# Altium PCB smartMCUpcb.PcbDoc
Units mil, origin at the board's own origin, x right, y up, seen from the top; angles counter-clockwise.
Board outline 2457.03 x 1607.03 mil, 4 copper layers (Top Layer, GND_layer, 3.3v_layer, Bottom Layer), stack 23.756 mil thick; 92 components, 44 nets, 279 pads, 102 vias.
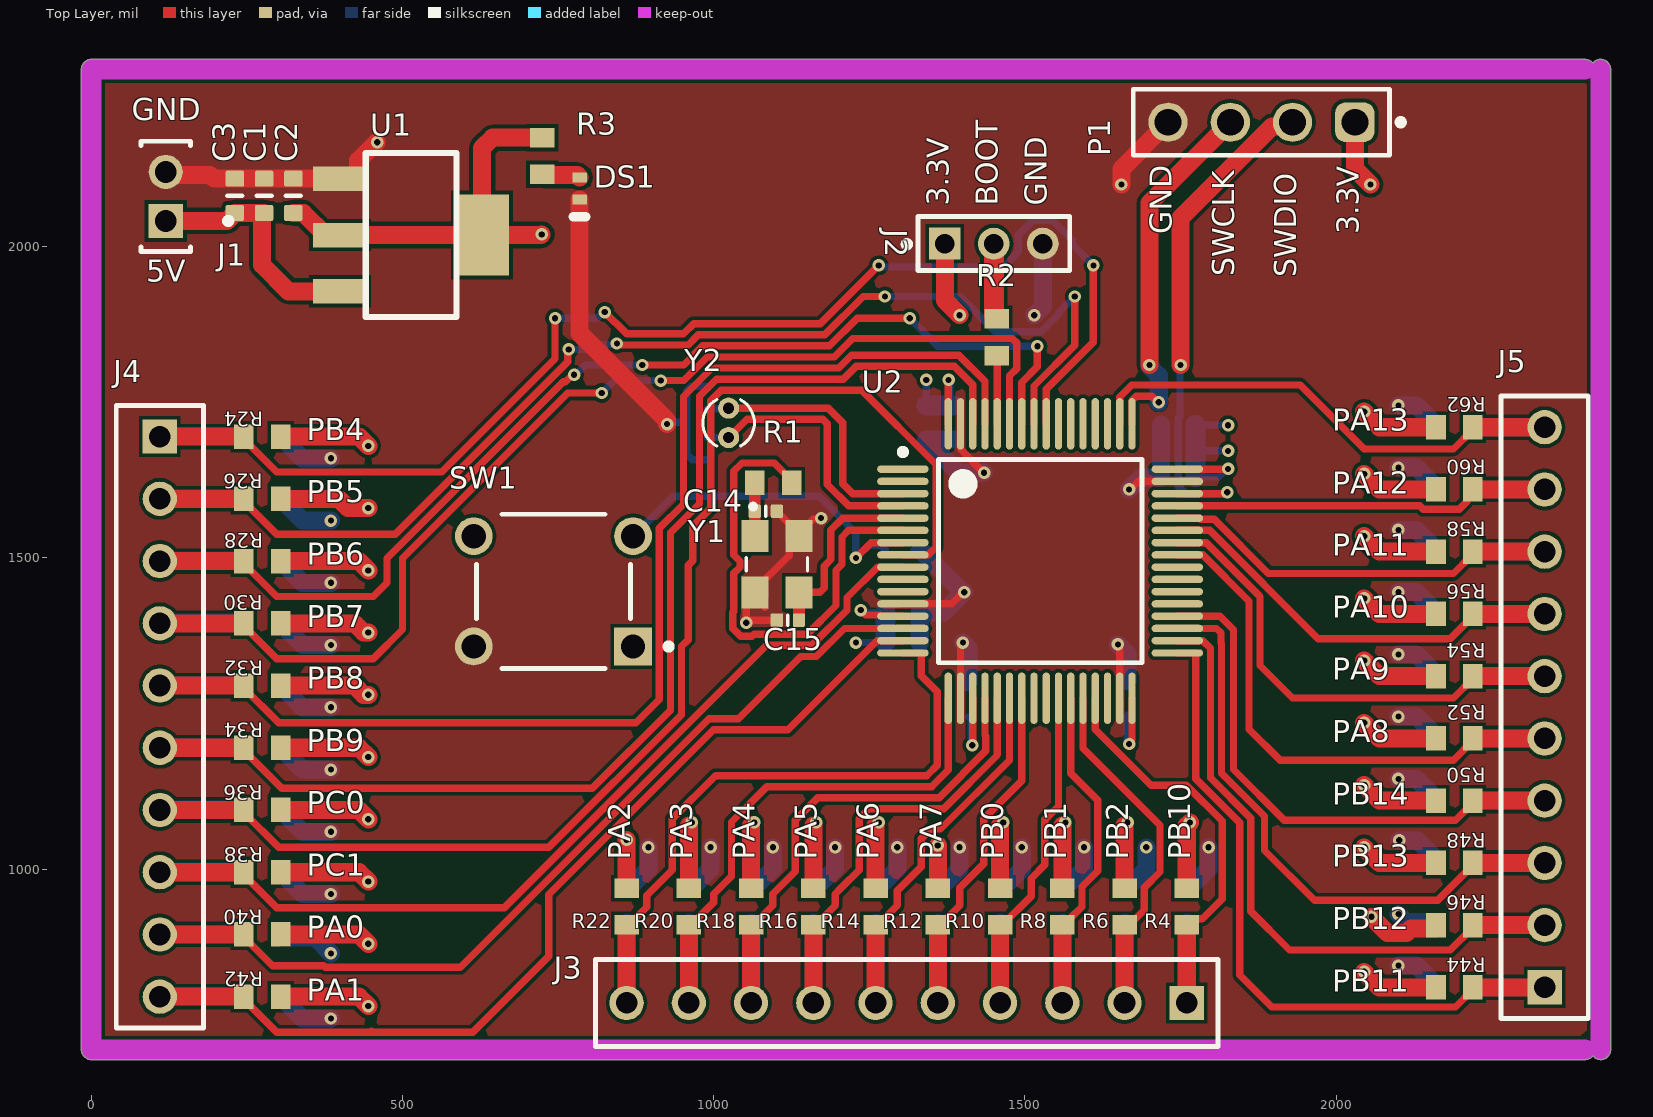
[diagram p0: Top Layer view]
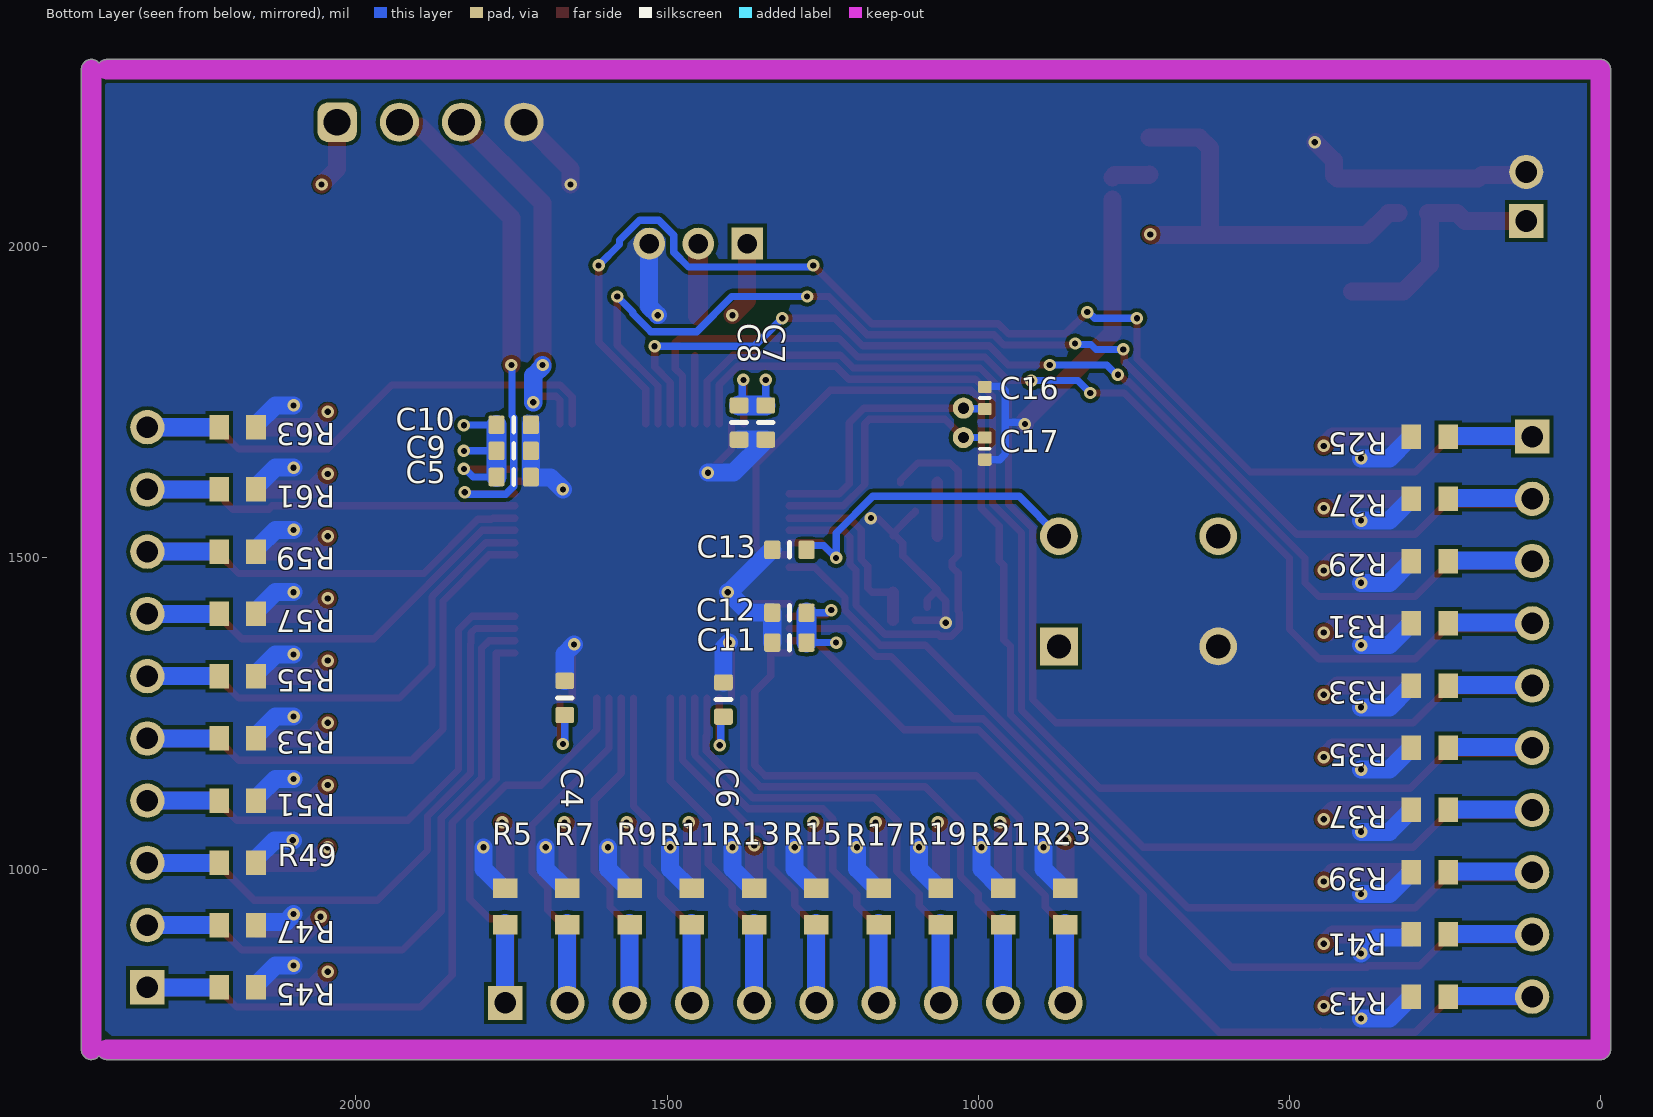
[diagram p1: Bottom Layer view, seen from below]
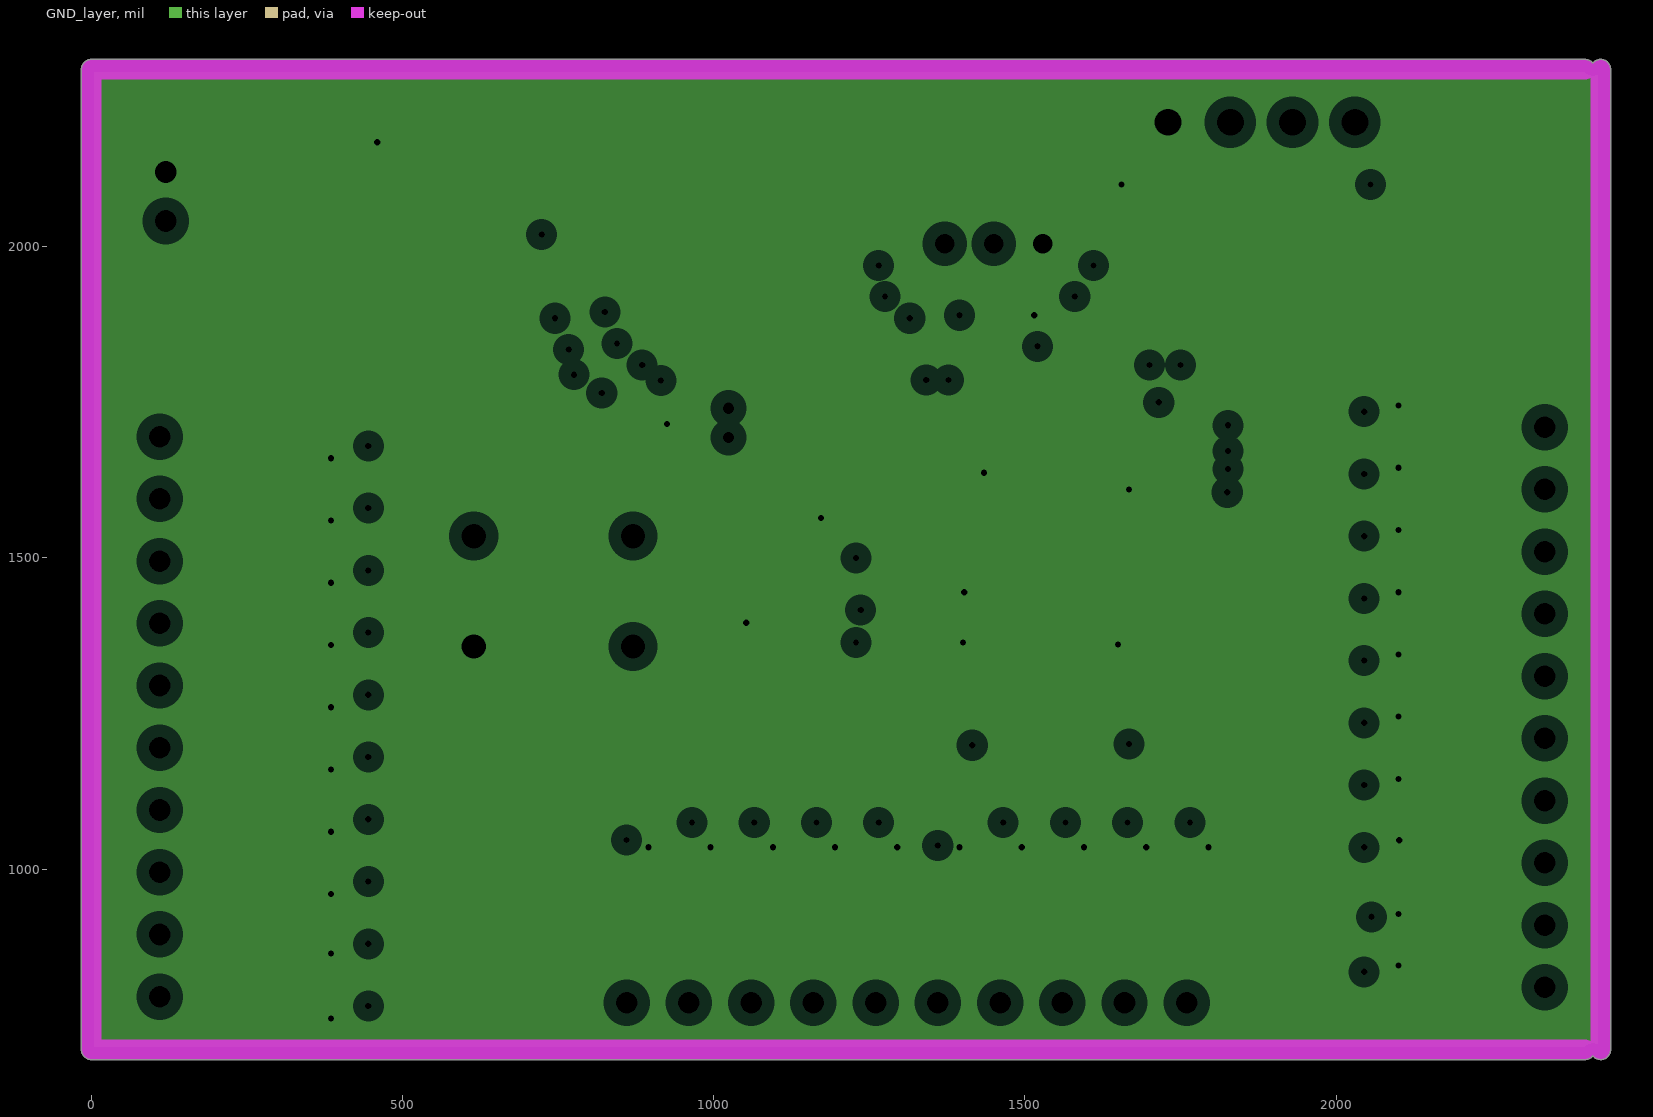
[diagram p2: GND_layer, clearances drawn from the general rule]
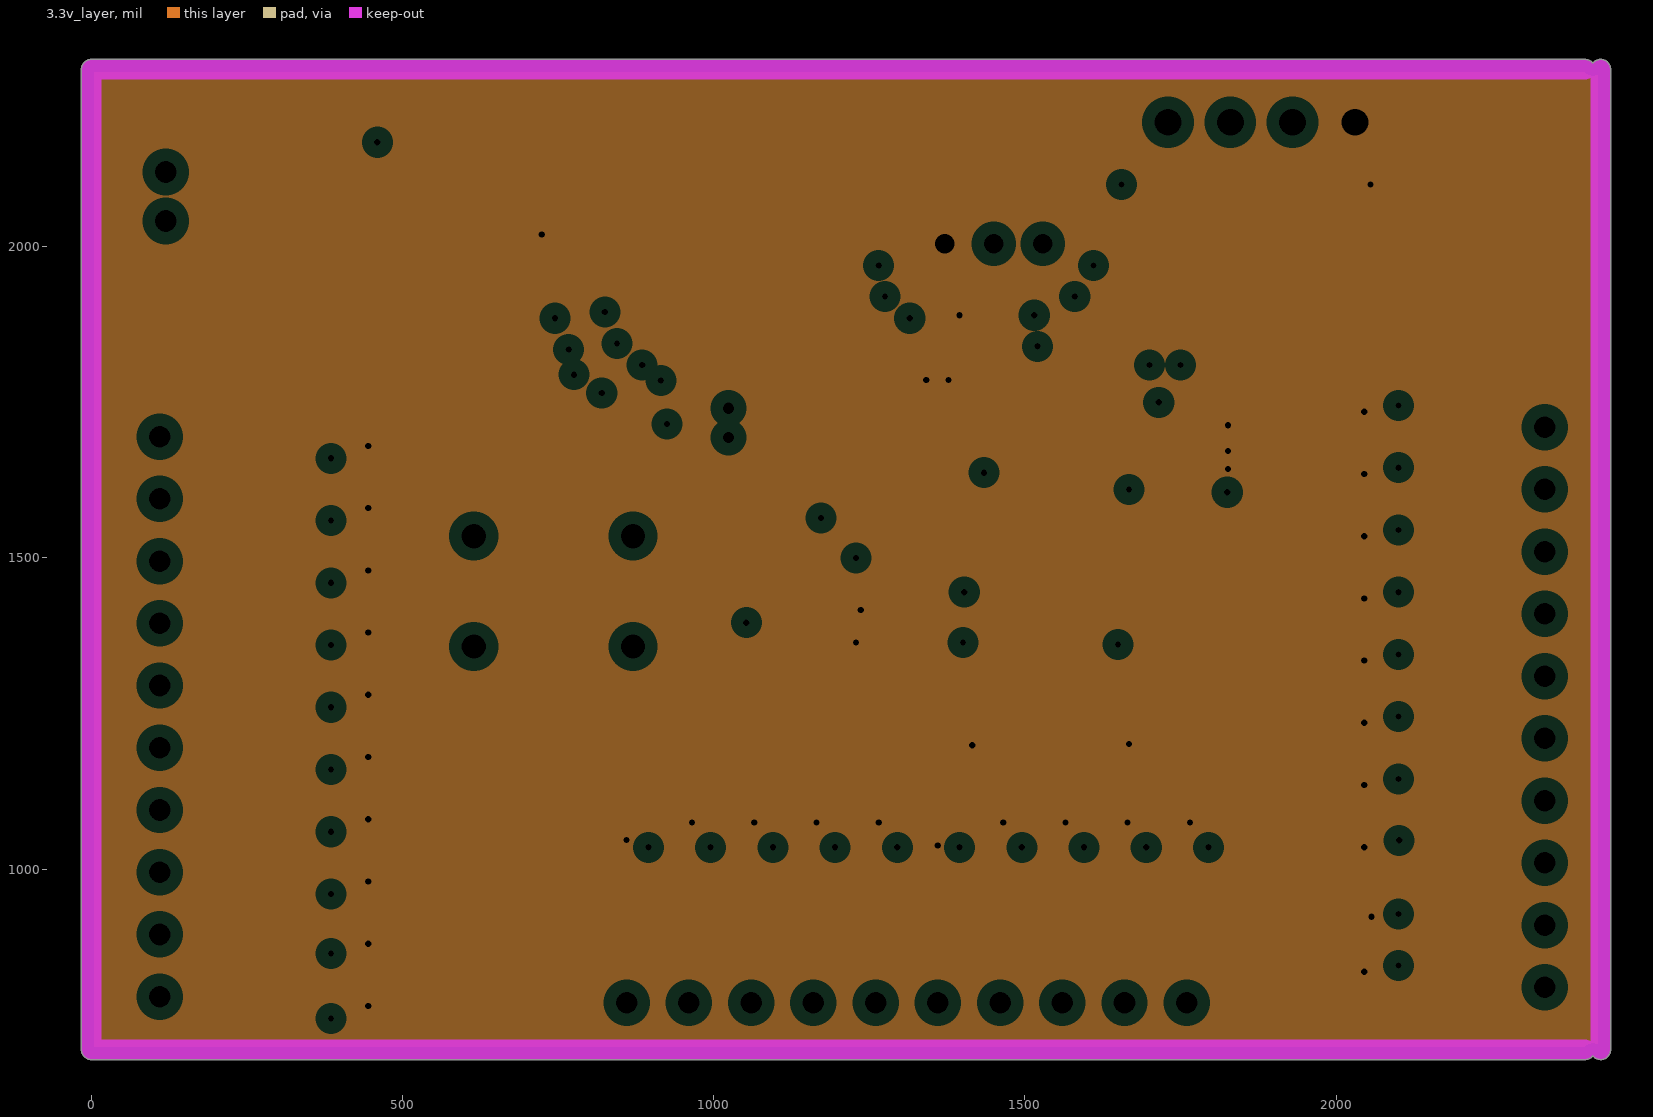
[diagram p3: 3.3v_layer, clearances drawn from the general rule]
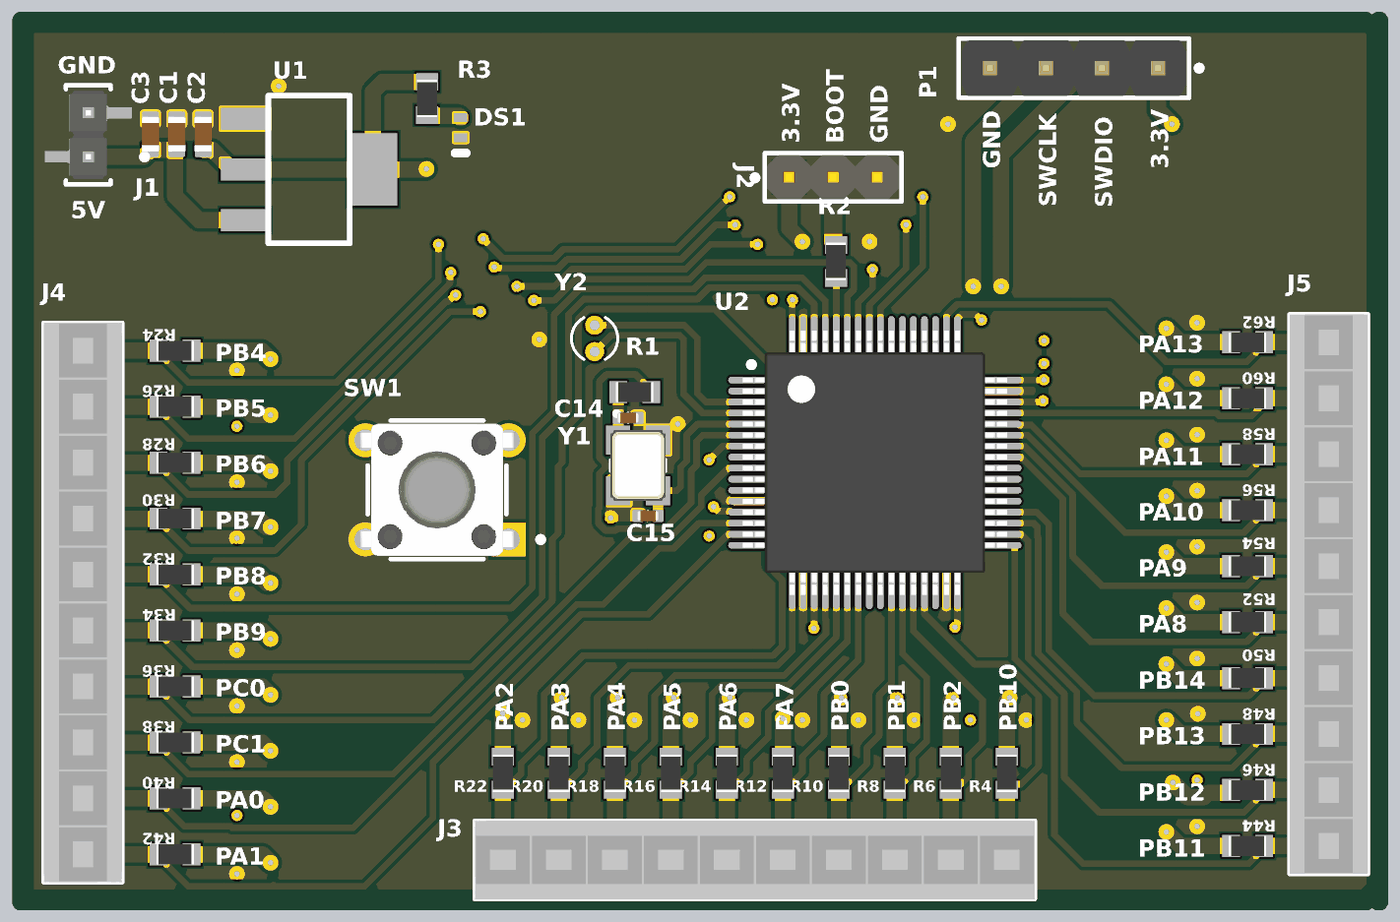
[diagram p4: 3D render of the assembled board from above, using the file's embedded part models]
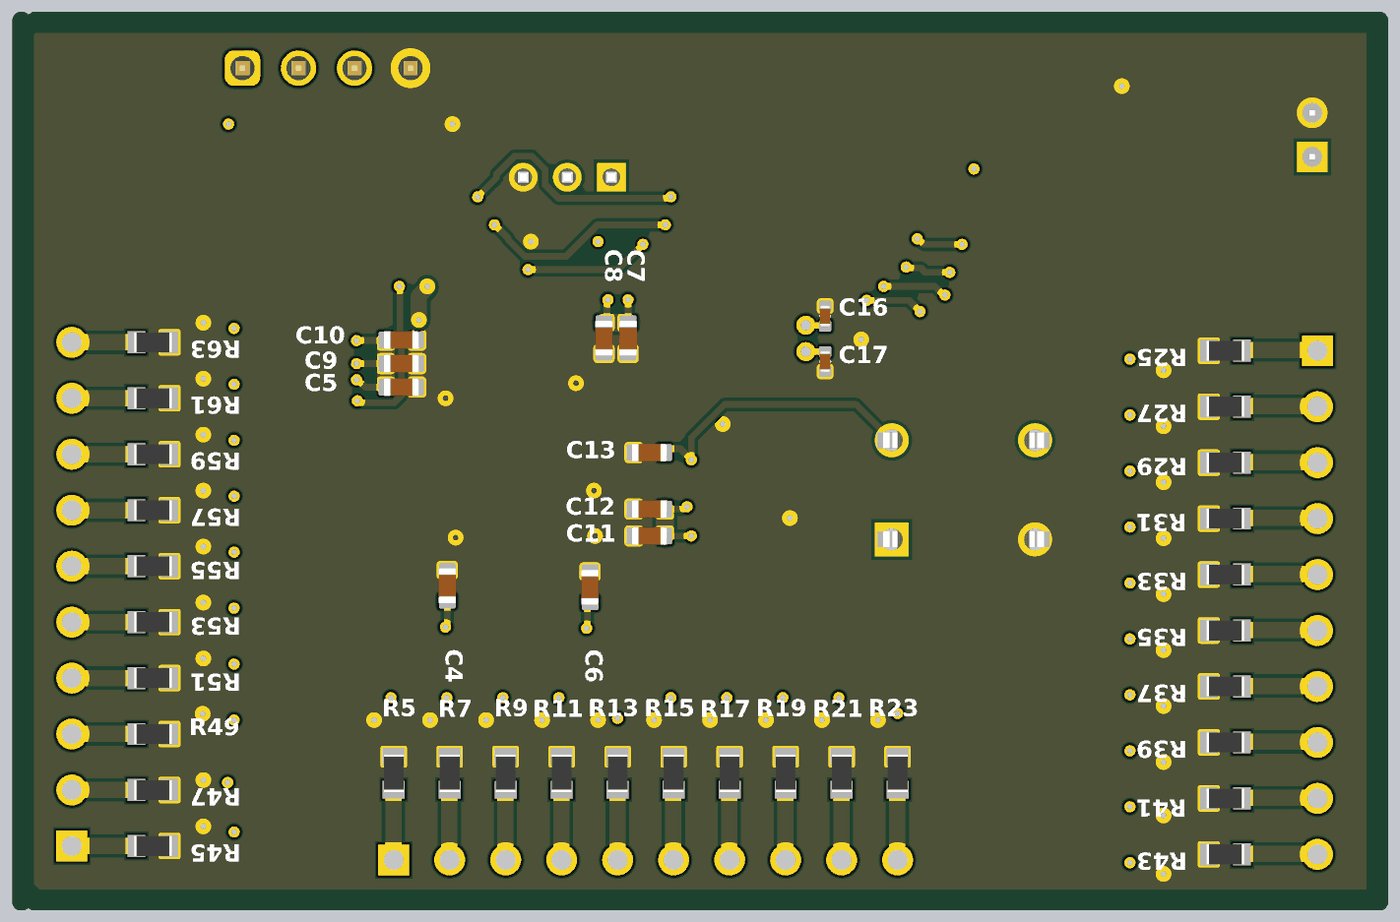
[diagram p5: 3D render of the assembled board from below, using the file's embedded part models]

## Layer stack, top to bottom
Top Solder: solder mask 0.4, Solder Resist, Dk 3.5
Top Layer: signal copper 1.4
Dielectric 2: prepreg 2.8, PP-006, Dk 4.1
GND_layer: plane copper 1.378, net GND
Dielectric 1: dielectric 12.6, FR-4, Dk 4.8
3.3v_layer: plane copper 1.378, net +3.3V
Dielectric 3: prepreg 2.8, PP-006, Dk 4.1
Bottom Layer: signal copper 1.4
Bottom Solder: solder mask 0.4, Solder Resist, Dk 3.5

## Board outline
0,693.98 cw(c0,710) -16.01,710 -16.01,2285 cw(c0,2285) 0,2301.01 2400,2301.01 cw(c2400,2285) 2412.5,2295.01 cw(c2425,2285) 2441.01,2285 2441.02,710 cw(c2425,710) 2412.5,699.99 cw(c2400,710) 2400,693.98

## Design rules (kind name [scope] priority, off if disabled: settings)
Clearance [All] p1: gap=6 ignorepadtopadclearanceinfootprint=FALSE
PlaneClearance [All] p1: clearance=20
PlaneConnect [All] p1: planeconnectstyle=Direct reliefexpansion=20 reliefentries=4 reliefconductorwidth=10 reliefairgap=10
PolygonConnect [All] p1: connectstyle=Direct reliefconductorwidth=10 reliefentries=4 polygonreliefangle="90 Angle" airgapwidth=10
RoutingVias [All] p1: holewidth=10 width=20 viastyle="Through Hole" minholewidth=10 minwidth=20 maxholewidth=28 maxwidth=50
SolderMaskExpansion [All] p1: expansion=4 istentingtop=FALSE
SupplyNets "Schematic Supply Nets_2" [InNet('+5V')] p1: voltage=0.000
SupplyNets "Schematic Supply Nets_1" [InNet('GND')] p2: voltage=0.000
SupplyNets "Schematic Supply Nets" [InNet('+3.3V')] p3: voltage=0.000
Width [All] p1: maxlimit=54 minlimit=10 preferedwidth=10
28 further rules are at their usual default settings.

## Classes and differential pairs
component class powersupply: C1 C2 C3 DS1 J1 R3 U1
component class mcu: C4 C5 C6 C7 C8 C9 C10 C11 C12 C13 C14 C15 C16 C17 J2 J3 J4 J5 P1 R1 R2 R4 R5 R6 R7 R8 R9 R10 R11 R12 R13 R14 R15 R16 R17 R18 R19 R20 R21 R22 R23 R24 R25 R26 R27 R28 R29 R30 R31 R32 R33 R34 R35 R36 R37 R38 R39 R40 R41 R42 R43 R44 R45 R46 R47 R48 R49 R50 R51 R52 R53 R54 R55 R56 R57 R58 R59 R60 R61 R62 R63 SW1 U2 Y1 Y2

## Components (designator, comment, footprint, x,y, rotation, side; value= is the part's Value field where it differs from the comment)
C1 "tantalum" CAPC0603(1608)100_L 277.53,2081.84 r270 top value=10uf
C2 "tantalum" CAPC0603(1608)100_L 324.53,2081.84 r270 top value=100uf
C3 "Capacitor 4.7µF +/-20% 10V 0603" CAPC0603(1608)100_L 230.53,2081.84 r270 top value=4.7nF
C4 "Capacitor 4.7µF +/-20% 10V 0603" CAPC0603(1608)100_L 1664.4,1275 r90 bottom value=100nF
C5 "Capacitor 4.7µF +/-20% 10V 0603" CAPC0603(1608)100_L 1746.4,1630 r180 bottom value=100nF
C6 "Capacitor 4.7µF +/-20% 10V 0603" CAPC0603(1608)100_L 1409.4,1272.44 r90 bottom value=100nF
C7 "Capacitor 4.7µF +/-20% 10V 0603" CAPC0603(1608)100_L 1341.4,1717.56 r270 bottom value=100nF
C8 "Capacitor 4.7µF +/-20% 10V 0603" CAPC0603(1608)100_L 1384.4,1717.56 r270 bottom value=100nF
C9 "Capacitor 4.7µF +/-20% 10V 0603" CAPC0603(1608)100_L 1746.4,1672 r180 bottom value=100nF
C10 "Capacitor 4.7µF +/-20% 10V 0603" CAPC0603(1608)100_L 1746.4,1714 r180 bottom value=4.7uF
C11 "Capacitor 4.7µF +/-20% 10V 0603" CAPC0603(1608)100_L 1303.4,1364 r0 bottom value=100nF
C12 "Capacitor 4.7µF +/-20% 10V 0603" CAPC0603(1608)100_L 1303.4,1412 r0 bottom value=1uF
C13 "Capacitor 4.7µF +/-20% 10V 0603" CAPC0603(1608)100_L 1303.4,1513 r0 bottom value=100nF
C14 "Capacitor 12pF +/-10% 50V 0402" CAPC0402(1005)33_L 1083.69,1575 r180 top value=10pF
C15 "Capacitor 12pF +/-10% 50V 0402" CAPC0402(1005)33_L 1119.12,1400 r0 top value=10pF
C16 "Capacitor 12pF +/-10% 50V 0402" CAPC0402(1005)33_L 989.4,1757 r270 bottom value=10pF
C17 "Capacitor 12pF +/-10% 50V 0402" CAPC0402(1005)33_L 989.4,1675.66 r90 bottom value=10pF
DS1 "16-219A/T2D-AR2T1QY/3T" EVRL-0402-2_V 784.53,2093.56 r270 top
J1 "battery" FP-TMM-102-03-T-S-MFG 119.53,2080.84 r90 top
J2 "951103-8622-AR" FP-951103-8622-AR-MFG 1450,2005 r0 top
J3 "5-534237-8" TECO-5-534237-8_V 1310,785 r180 top
J4 "5-534237-8" TECO-5-534237-8_V 110,1245 r270 top
J5 "5-534237-8" TECO-5-534237-8_V 2335,1260 r90 top
P1 "61300411121" 61300411121 1880,2200 r180 top
R1 "Resistor 0R +/- 5% 0603 100 mW" RESC1608X55X25ML10T15 1095.5,1621 r180 top value=10R
R2 "Resistor 0R +/- 5% 0603 100 mW" RESC1608X55X25ML10T15 1455,1854.53 r90 top value=10R
R3 "Resistor 0R +/- 5% 0603 100 mW" RESC1608X55X25ML10T15 724.53,2145.84 r270 top value=330R
R4 "Resistor 0R +/- 5% 0603 100 mW" RESC1608X55X25ML10T15 1760,940 r270 top value=1K
R5 "Resistor 0R +/- 5% 0603 100 mW" RESC1608X55X25ML10T15 1760,940 r90 bottom value=1k
R6 "Resistor 0R +/- 5% 0603 100 mW" RESC1608X55X25ML10T15 1660,940 r270 top value=1K
R7 "Resistor 0R +/- 5% 0603 100 mW" RESC1608X55X25ML10T15 1660,940 r90 bottom value=1k
R8 "Resistor 0R +/- 5% 0603 100 mW" RESC1608X55X25ML10T15 1560,940 r270 top value=1K
R9 "Resistor 0R +/- 5% 0603 100 mW" RESC1608X55X25ML10T15 1560,940 r90 bottom value=1k
R10 "Resistor 0R +/- 5% 0603 100 mW" RESC1608X55X25ML10T15 1460,940 r270 top value=1K
R11 "Resistor 0R +/- 5% 0603 100 mW" RESC1608X55X25ML10T15 1460,940 r90 bottom value=1k
R12 "Resistor 0R +/- 5% 0603 100 mW" RESC1608X55X25ML10T15 1360,940 r270 top value=1K
R13 "Resistor 0R +/- 5% 0603 100 mW" RESC1608X55X25ML10T15 1360,940 r90 bottom value=1k
R14 "Resistor 0R +/- 5% 0603 100 mW" RESC1608X55X25ML10T15 1260,940 r270 top value=1K
R15 "Resistor 0R +/- 5% 0603 100 mW" RESC1608X55X25ML10T15 1260,940 r90 bottom value=1k
R16 "Resistor 0R +/- 5% 0603 100 mW" RESC1608X55X25ML10T15 1160,940 r270 top value=1K
R17 "Resistor 0R +/- 5% 0603 100 mW" RESC1608X55X25ML10T15 1160,940 r90 bottom value=1k
R18 "Resistor 0R +/- 5% 0603 100 mW" RESC1608X55X25ML10T15 1060,940 r270 top value=1K
R19 "Resistor 0R +/- 5% 0603 100 mW" RESC1608X55X25ML10T15 1060,940 r90 bottom value=1k
R20 "Resistor 0R +/- 5% 0603 100 mW" RESC1608X55X25ML10T15 960,940 r270 top value=1K
R21 "Resistor 0R +/- 5% 0603 100 mW" RESC1608X55X25ML10T15 960,940 r90 bottom value=1k
R22 "Resistor 0R +/- 5% 0603 100 mW" RESC1608X55X25ML10T15 860,940 r270 top value=1K
R23 "Resistor 0R +/- 5% 0603 100 mW" RESC1608X55X25ML10T15 860,940 r90 bottom value=1k
R24 "Resistor 0R +/- 5% 0603 100 mW" RESC1608X55X25ML10T15 274.53,1695 r180 top value=1K
R25 "Resistor 0R +/- 5% 0603 100 mW" RESC1608X55X25ML10T15 274.53,1695 r0 bottom value=1k
R26 "Resistor 0R +/- 5% 0603 100 mW" RESC1608X55X25ML10T15 274.53,1595 r180 top value=1K
R27 "Resistor 0R +/- 5% 0603 100 mW" RESC1608X55X25ML10T15 274.53,1595 r0 bottom value=1k
R28 "Resistor 0R +/- 5% 0603 100 mW" RESC1608X55X25ML10T15 274.53,1495 r180 top value=1K
R29 "Resistor 0R +/- 5% 0603 100 mW" RESC1608X55X25ML10T15 274.53,1495 r0 bottom value=1k
R30 "Resistor 0R +/- 5% 0603 100 mW" RESC1608X55X25ML10T15 274.53,1395 r180 top value=1K
R31 "Resistor 0R +/- 5% 0603 100 mW" RESC1608X55X25ML10T15 274.53,1395 r0 bottom value=1k
R32 "Resistor 0R +/- 5% 0603 100 mW" RESC1608X55X25ML10T15 274.53,1295 r180 top value=1K
R33 "Resistor 0R +/- 5% 0603 100 mW" RESC1608X55X25ML10T15 274.53,1295 r0 bottom value=1k
R34 "Resistor 0R +/- 5% 0603 100 mW" RESC1608X55X25ML10T15 274.53,1195 r180 top value=1K
R35 "Resistor 0R +/- 5% 0603 100 mW" RESC1608X55X25ML10T15 274.53,1195 r0 bottom value=1k
R36 "Resistor 0R +/- 5% 0603 100 mW" RESC1608X55X25ML10T15 274.53,1095 r180 top value=1K
R37 "Resistor 0R +/- 5% 0603 100 mW" RESC1608X55X25ML10T15 274.53,1095 r0 bottom value=1k
R38 "Resistor 0R +/- 5% 0603 100 mW" RESC1608X55X25ML10T15 274.53,995 r180 top value=1K
R39 "Resistor 0R +/- 5% 0603 100 mW" RESC1608X55X25ML10T15 274.53,995 r0 bottom value=1k
R40 "Resistor 0R +/- 5% 0603 100 mW" RESC1608X55X25ML10T15 274.53,895 r180 top value=1K
R41 "Resistor 0R +/- 5% 0603 100 mW" RESC1608X55X25ML10T15 274.53,895 r0 bottom value=1k
R42 "Resistor 0R +/- 5% 0603 100 mW" RESC1608X55X25ML10T15 274.53,795 r180 top value=1K
R43 "Resistor 0R +/- 5% 0603 100 mW" RESC1608X55X25ML10T15 274.53,795 r0 bottom value=1k
R44 "Resistor 0R +/- 5% 0603 100 mW" RESC1608X55X25ML10T15 2190,810 r0 top value=1K
R45 "Resistor 0R +/- 5% 0603 100 mW" RESC1608X55X25ML10T15 2190,810 r180 bottom value=1k
R46 "Resistor 0R +/- 5% 0603 100 mW" RESC1608X55X25ML10T15 2190,910 r0 top value=1K
R47 "Resistor 0R +/- 5% 0603 100 mW" RESC1608X55X25ML10T15 2190,910 r180 bottom value=1k
R48 "Resistor 0R +/- 5% 0603 100 mW" RESC1608X55X25ML10T15 2190,1010 r0 top value=1K
R49 "Resistor 0R +/- 5% 0603 100 mW" RESC1608X55X25ML10T15 2190,1010 r180 bottom value=1k
R50 "Resistor 0R +/- 5% 0603 100 mW" RESC1608X55X25ML10T15 2190,1110 r0 top value=1K
R51 "Resistor 0R +/- 5% 0603 100 mW" RESC1608X55X25ML10T15 2190,1110 r180 bottom value=1k
R52 "Resistor 0R +/- 5% 0603 100 mW" RESC1608X55X25ML10T15 2190,1210 r0 top value=1K
R53 "Resistor 0R +/- 5% 0603 100 mW" RESC1608X55X25ML10T15 2190,1210 r180 bottom value=1k
R54 "Resistor 0R +/- 5% 0603 100 mW" RESC1608X55X25ML10T15 2190,1310 r0 top value=1K
R55 "Resistor 0R +/- 5% 0603 100 mW" RESC1608X55X25ML10T15 2190,1310 r180 bottom value=1k
R56 "Resistor 0R +/- 5% 0603 100 mW" RESC1608X55X25ML10T15 2190,1410 r0 top value=1K
R57 "Resistor 0R +/- 5% 0603 100 mW" RESC1608X55X25ML10T15 2190,1410 r180 bottom value=1k
R58 "Resistor 0R +/- 5% 0603 100 mW" RESC1608X55X25ML10T15 2190,1510 r0 top value=1K
R59 "Resistor 0R +/- 5% 0603 100 mW" RESC1608X55X25ML10T15 2190,1510 r180 bottom value=1k
R60 "Resistor 0R +/- 5% 0603 100 mW" RESC1608X55X25ML10T15 2190,1610 r0 top value=1K
R61 "Resistor 0R +/- 5% 0603 100 mW" RESC1608X55X25ML10T15 2190,1610 r180 bottom value=1k
R62 "Resistor 0R +/- 5% 0603 100 mW" RESC1608X55X25ML10T15 2190,1710 r0 top value=1K
R63 "Resistor 0R +/- 5% 0603 100 mW" RESC1608X55X25ML10T15 2190,1710 r180 bottom value=1k
SW1 "1-1825910-4" FP-1-1825910-4-MFG 742.45,1446.42 r270 top
U1 "Low Dropout Linear Regulator" "4 pin SOT" 513.7,1886.96 r270 top
U2 "STM32F401RBT6" STM-LQFP64_M 1524.4,1495 r0 top
Y1 "ECS-80-12-33-JGN-TR3" XTAL_ECS-240-8-33-AGN-TR 1101.4,1490 r270 top
Y2 "ECS-.320-12.5-13" XTAL_ECS-.655-12.5-13X 1023.87,1717 r90 top

## Footprints (in the part's own frame and the unit in brackets; to place one, negate y for a bottom-side part, rotate by r counter-clockwise, add the part's x,y. Pads: shape width x height; smd on the part's side, far side on the other; paste and mask are expansions set on the pad)
"4 pin SOT" [mm]
  rect 1x2.2 smd: 0(-1.05,-2.9) 1(-5.65,-2.9) 2(-3.35,-2.9)
  rect 3.3x2.2 smd: 2(-3.35,2.9)
  silkscreen extent -6.7,-1.85 0,1.85
61300411121 [mm] "Pin Header, pitch 2.54 mm, THT, Vertical, single row, 4p"
  rrect50% 1.6x1.6 hole 1.1: 1(-3.81,0)
  round 1.6 hole 1.1: 2(-1.27,0) 3(1.27,0) 4(3.81,0)
  silkscreen extent -5.8,-1.35 5.23,1.35, body extent -5.08,-1.27 5.08,1.27, height 8.57
CAPC0402(1005)33_L [mm] "Chip Capacitor, Body 1.0x0.5mm, Height 0.33mm, IPC High Density"
  rrect25% 0.5x0.55 smd: 1(-0.45,0) 2(0.45,0)
  silkscreen extent 0,-0.2 0,0.2, body extent -0.5,-0.25 0.5,0.25, height 0.55
CAPC0603(1608)100_L [mm] "Chip Capacitor, Body 1.6x0.8mm, Height 1.0mm, IPC High Density"
  rrect25% 0.66x0.76 smd: 1(-0.7,0) 2(0.7,0)
  silkscreen extent 0,-0.3 0,0.3, body extent -0.8,-0.4 0.8,0.4, height 0.95
EVRL-0402-2_V [mm] "SMD, 2-Leads, Body 1x0.5mm"
  rect 0.4x0.6 smd: 1(-0.45,0) 2(0.45,0)
  silkscreen extent 1.15,-0.25 1.15,0.25, body extent -0.5,-0.25 0.5,0.25, height 0.25
FP-1-1825910-4-MFG [mm]
  rect 1.54x1.54 hole 0.99 paste-2539.97 mask+0: 1(2.25,3.25)
  round 1.54 hole 0.99 paste-2539.97 mask+0: 2(2.25,-3.25) 3(-2.25,3.25) 4(-2.25,-3.25)
  silkscreen extent -3.15,-3.15 3.15,4.83, body extent -3.24,-4.12 3.24,4.12, height 0.25
FP-951103-8622-AR-MFG [mm]
  rect 1.3x1.3 hole 0.8 paste-2539.97 mask+0: 1(-2,0)
  round 1.3 hole 0.8 paste-2539.97 mask+0: 2(0,0) 3(2,0)
  silkscreen extent -3.67,-1.1 3.1,1.1, body extent -3.2,-1.2 3.2,1.2, height 0.25
FP-TMM-102-03-T-S-MFG [mm]
  rect 1.39x1.39 hole 0.89 paste-2539.97 mask+0: 1(-1,0)
  round 1.39 hole 0.89 paste-2539.97 mask+0: 2(1,0)
  silkscreen extent -2.25,-2.68 2.25,1.02, body extent -2.1,-2.07 2.1,2.07, height 0.25
RESC1608X55X25ML10T15 [mm] "Chip Resistor, 2-Leads, Body 1.70x0.90mm, IPC Low Density"
  rect 0.8x1 smd: 1(-0.75,0) 2(0.75,0)
  body extent -0.85,-0.45 0.85,0.45, height 0.55
STM-LQFP64_M [mm] "Thin QFP, 64-Leads, Body 10x10mm, Pitch 0.5mm, IPC Low Density"
  oval 2.1x0.3 smd: 1(-5.6,3.75) 2(-5.6,3.25) 3(-5.6,2.75) 4(-5.6,2.25) 5(-5.6,1.75) 6(-5.6,1.25) 7(-5.6,0.75) 8(-5.6,0.25) 9(-5.6,-0.25) 10(-5.6,-0.75) 11(-5.6,-1.25) 12(-5.6,-1.75) 13(-5.6,-2.25) 14(-5.6,-2.75) 15(-5.6,-3.25) 16(-5.6,-3.75) 33(5.6,-3.75) 34(5.6,-3.25) 35(5.6,-2.75) 36(5.6,-2.25) 37(5.6,-1.75) 38(5.6,-1.25) 39(5.6,-0.75) 40(5.6,-0.25) 41(5.6,0.25) 42(5.6,0.75) 43(5.6,1.25) 44(5.6,1.75) 45(5.6,2.25) 46(5.6,2.75) 47(5.6,3.25) 48(5.6,3.75)
  oval 0.3x2.1 smd: 17(-3.75,-5.6) 18(-3.25,-5.6) 19(-2.75,-5.6) 20(-2.25,-5.6) 21(-1.75,-5.6) 22(-1.25,-5.6) 23(-0.75,-5.6) 24(-0.25,-5.6) 25(0.25,-5.6) 26(0.75,-5.6) 27(1.25,-5.6) 28(1.75,-5.6) 29(2.25,-5.6) 30(2.75,-5.6) 31(3.25,-5.6) 32(3.75,-5.6) 49(3.75,5.6) 50(3.25,5.6) 51(2.75,5.6) 52(2.25,5.6) 53(1.75,5.6) 54(1.25,5.6) 55(0.75,5.6) 56(0.25,5.6) 57(-0.25,5.6) 58(-0.75,5.6) 59(-1.25,5.6) 60(-1.75,5.6) 61(-2.25,5.6) 62(-2.75,5.6) 63(-3.25,5.6) 64(-3.75,5.6)
  silkscreen extent -5.72,-4.15 4.15,4.57, body extent -6,-6 6,6, height 1.6
TECO-5-534237-8_V [mm] "Receptacle, 10-Leads, Body 25.4x3.56mm, Pitch 2.54mm"
  rect 1.4x1.4 hole 0.88: 1(-11.43,0)
  round 1.4 hole 0.88: 2(-8.89,0) 3(-6.35,0) 4(-3.81,0) 5(-1.27,0) 6(1.27,0) 7(3.81,0) 8(6.35,0) 9(8.89,0) 10(11.43,0)
  silkscreen extent -12.7,-1.78 12.7,1.78, body extent -12.7,-1.78 12.7,1.78, height 8.65
XTAL_ECS-240-8-33-AGN-TR [mm]
  rect 1.3x1.1 smd: 1(-1.15,-0.9) 2(1.15,-0.9) 3(1.15,0.9) 4(-1.15,0.9)
  silkscreen extent -2.45,-1.25 0.27,1.25, body extent -1.6,-1.25 1.6,1.25, height 0.8
XTAL_ECS-.655-12.5-13X [mm]
  round 0.86 hole 0.46: 1(-0.6,0) 2(0.6,0)
  silkscreen extent -0.95,-1.05 0.95,1.05

## Part data
C1 C2 C3 C4 C5 C6 C7 C8 C9 C10 C11 C12 C13: library part CMP-001-00076-4, "Chip Capacitor, 4.7µF +/-20%, 10V, 0603, Thickness 1 mm", Case/Package=0603, Max Operating Temperature=85°C, Min Operating Temperature=-55°C, Tolerance=10%, Voltage Rating=10V, Mounting Technology=SMT, Pins=2
C14 C15 C16 C17: library part CMP-001-00072-4, "Chip Capacitor, 12pF +/-10%, 50V, 0402, Thickness 0.33 mm", Case/Package=0402, Max Operating Temperature=85°C, Min Operating Temperature=-55°C, Tolerance=20%, Voltage Rating=50V, Mounting Technology=SMT, Pins=2
DS1: library part CMP-007-00000-2, "Chip LED, White, 5 V, 10 mA, 30 mW, -40 to 85 degC, 2-Pin SMD (0402), RoHS, Tape and Reel", Case/Package=0402, Forward Current=5mA, Forward Voltage=2.6V, Illumination Colour=White, Manufacturer="Everlight Electronics", Max Operating Temperature=85°C, Min Operating Temperature=-40°C, Package Description="2-Pin Surface Mount Device, Body 1 x 0.5 mm", Package Quantity=3000, Power=30mW, Datasheet URL=http://www.everlight.com/file/ProductFile/16-219A-T2D-AR2T1QY-3T.pdf, Datasheet Version="Rev. 5, 04/2013", Luminous Intensity=360mcd, Manufacturer URL=http://www.everlight.com/, Mounting Technology=SM, Package Reference=0402, Packaging=TapeandReel, RoHS Compliant=True, Viewing Angle=130degrees
J1: library part CMP-02766-001621-1, "CONN HEADER VERT 2POS 2MM", Color=Black, Max Current Rating=3.9A, Max Operating Temperature=105°C, Max Voltage Rating (AC)=500V, Min Operating Temperature=-55°C, Package Quantity=1, Connector Type=Header, Contact Finish - Mating=TIN, Contact Material=Bronze, Contact Mating Length=0.157inch, Contact Plating=Tin, Contact Shape=Square, Contact Type="Male Pin", Depth=1.97mm, Fastening Type=Pull, Gender=Male, Housing Color=Black, Housing Material=Polymer, Insulation Color=Black, Insulation Material=Polymer, Lead Free="Lead Free", Length=4mm, Mount="Through Hole", Number of Contacts=2, Number of Positions=2, Number of Rows=1, Orientation=Straight, Packaging=Bulk, Pitch=2mm, Radiation Hardening=No, REACH SVHC="No SVHC", RoHS Compliant=Yes, Series=TMM, Termination=Solder
J2: library part CMP-05379-000003-1, "CONN HEADER VERT 3POS 2MM", Current Rating=2A, Manufacturer=3M, Temperature="-55°C to +125°C", Temperature Range High=+125°C, Temperature Range Low=-55°C, Automotive=No, Category=Conn, ComponentLink2Description=Datasheet, ComponentLink2URL=http://multimedia.3m.com/mws/media/1400506O/3m-pin-strip-header-951-series-78-5100-2653-3.pdf, Conn Gender=Male, Conn Orientation=Straight, Contact Material=Gold,Nickel, Device Class L1=Connectors, Device Class L2="Headers and Wire Housings", Device Class L3=unset, Digikey Description="CONN HEADER VERT 3POS 2MM", Height=6.3mm, Lead Free=Yes, Manufacturer Part Number=951103-8622-AR, Mouser Description="Header; PinStrip; CopperAlloy; HighTempThermoplastic; 3Cnts; 1A; RtAngle; 951Series", Number of Contacts=3, Number of Rows=1, Octopart=https://octopart.com/951103-8622-ar-3m-14400669, Package=951103-8622-AR, Pitch=2mm, RoHS=TRUE
J3 J4 J5: library part CMP-002-00019-2, "Female Receptacle, Pitch 2.54 mm, 1 x 10 Position, Height 8.64 mm, Tail Length 2.92 mm, -65 to 105 degC, RoHS, Tube", Colour=Black, Current Rating=2A, Manufacturer="TE Connectivity", Max Contact Resistance=12mohm, Max Operating Temperature=105°C, Min Operating Temperature=-65°C, Package Description="Female Receptacle, Pitch 2.54 mm, 1 x 10 Position, Height 8.64 mm, Tail Length 2.92 mm", Package Quantity=22, Voltage Rating=750V, Case/Package=5-534237-8, Connector Type=Header, Contact Finish=Gold, Contact Material=Bronze, Contact Plating=Gold, Datasheet URL=http://www.te.com/commerce/DocumentDelivery/DDEController?Action=showdoc&DocId=Customer+Drawing%7F534237%7FR5%7Fpdf%7FEnglish%7FENG_CD_534237_R5.pdf%7F5-534237-8, Datasheet Version=Apr-13, Gender=Female, Lead Pitch=2.54mm, Manufacturer URL=http://www.te.com/, Mounting Technology=TH, Package Reference=5-534237-8, Packaging=Rail/Tube, Pins=10, RoHS Compliant=True, Rows=1
P1: library part CMP-1502-01064-3, Color=Black, Contact Resistance=20mΩ, Current Rating=3A, Max Operating Temperature=105°C, Min Operating Temperature=-40°C, Operating Supply Voltage=250V, Connector Type="Male Pin", Contact Material=Copper, Contact Mating Length=5.9944mm, Contact Plating=Gold, Gender=Male, Height=8.89mm, Lead Free="Lead Free", Lead Pitch=2.54mm, Mount="Through Hole", NexarPartId=32855522, Number of Contacts=4, Number of Pins=4, Number of Positions=4, Number of Rows=1, Orientation=Vertical, Packaging=Bulk, Pitch=2.54mm, REACH SVHC=Unknown, RoHS=Compliant, Termination=Solder, Voltage Rating=250V
R1 R2 R3 R4 R5 R6 R7 R8 R9 R10 R11 R12 R13 R14 R15 R16 R17 R18 R19 R20 R21 R22 R23 R24 R25 R26 R27 R28 R29 R30 R31 R32 R33 R34 R35 R36 R37 R38 R39 R40 R41 R42 R43 R44 R45 R46 R47 R48 R49 R50 R51 R52 R53 R54 R55 R56 R57 R58 R59 R60 R61 R62 R63: library part CMP-009-00006-5, "Chip Resistor, 0 Ohm, 0.1 W, -55 to 155 degC, 0603 (1608 Metric)", Case/Package=0603, Max Operating Temperature=155°C, Min Operating Temperature=-55°C, Power=100mW, Tolerance=5%, Voltage Rating=50V, Mounting Technology=SM, Pins=2, RoHS Compliant=True
SW1: library part CMP-03407-000002-1, "SWITCH TACTILE SPST-NO 0.05A 24V", Contact Current Rating=50mA, Contact Resistance=100mΩ, Manufacturer="TE Connectivity", Operating Force=160gf, Temperature="-35°C to +85°C", Temperature Range High=+85°C, Temperature Range Low=-35°C, Voltage Rating Dc=24V, Automotive=No, Category=Switch, ComponentLink2Description=Datasheet, ComponentLink2URL=https://www.te.com/commerce/DocumentDelivery/DDEController?Action=showdoc&DocId=Customer+Drawing%7F1825910%7FC10%7Fpdf%7FEnglish%7FENG_CD_1825910_C10.pdf%7F1-1825910-4, Device Class L1=Electromechanical, Device Class L2=Switches, Device Class L3="Tactile Switches", Digikey Description="SWITCH TACTILE SPST-NO 0.05A 24V", Electromechanical Life=100000Cycles, Height=9.8mm, Lead Free=Yes, Manufacturer Part Number=1-1825910-4, Mount="Through Hole", Mouser Description="Tactile Switches 6MM ACTHIGH TEMP TACT SWITCH", Octopart=https://octopart.com/1-1825910-4-te+connectivity-42270468, Package=1-1825910-4, RoHS=TRUE, Throw Configuration=SPST-NO
U1: library part lm1117, ComponentLink1Description=Datasheet, ComponentLink1URL=https://www.ti.com/lit/ds/symlink/lm1117.pdf, Output Volatge=3.3v
U2: library part CMP-020-00012-3, "ARM Cortex -M4 32b MCU+FPU, 256 KB Flash, 64 KB RAM, -40 to 85 degC, 64-Pin LQFP, RoHS, Tray", Case/Package=LQFP, Frequency=84MHz, Manufacturer=STMicroelectronics, Max Supply Voltage=3.6V, Min Supply Voltage=1.8V, Package Description="64-Pin Low-profile Quad Flat Package, Body 10 x 10 mm, Pitch 0.5 mm", Package Quantity=160, Package Reference=LQFP64, Power=313mW, Datasheet URL=http://www.st.com/st-web-ui/static/active/en/resource/technical/document/datasheet/DM00086815.pdf, Datasheet Version="Rev. 5, 08/2015", Density=128KB, I/Os=50, Interface=USART, Manufacturer URL=http://www.st.com/, Mounting Technology=SM, Packaging=Tray, Pins=64, RAM Size=64KB, RoHS Compliant=True
Y1: "Crystal 8MHz Â±20ppm (Tol) Â±30ppm (Stability) 12pF FUND 400Ohm 4-Pin Mini-CSMD T/R", Package="ECX-32-33-4 ECS", Check_prices=https://www.snapeda.com/parts/ECS-80-12-33-JGN-TR3/ECS/view-part/?ref=eda, MF="ECS Inc.", MP=ECS-80-12-33-JGN-TR3, SnapEDA_Link=https://www.snapeda.com/parts/ECS-80-12-33-JGN-TR3/ECS/view-part/?ref=snap
Y2: "Crystal  Cylindrical Can, Radial", Package=None, Availability=Unavailable, MP=ECS-.320-12.5-13, Price=None

## Via types
v1: diameter 20, hole 10, Top Layer to Bottom Layer, 101 vias
v2: diameter 20/20 (per signal layer), hole 10, Top Layer to Bottom Layer, 1 vias

## Nets (pads, with @x,y where several pads share a name; then routed paths per layer and width w, separated by ;. In a path a pad name is that pad's centre, name@x,y a point inside that pad or via, vN(x,y) a via of type N, cw(c..) or ccw(c..) an arc to the next point about the centre after c; other vN are vias at no path point)
32KHz_1: C16.2 U2.3 Y2.2 | length 429.4
  Top Layer w11.8: Y2.2 1183.78,1740.62 1207.4,1717 1207.4,1619 1223.13,1603.27 U2.3
  Bottom Layer w11.8: C16.2 990.07,1739.95 1023.2,1739.95 Y2.2
32KHz_2: C17.2 U2.4 Y2.1 | length 441.7
  Top Layer w11.8: Y2.1 1053.31,1722.82 1175.4,1722.82 1182.4,1715.82 1182.4,1618 1216.82,1583.58 U2.4
  Bottom Layer w11.8: C17.2 Y2.1
+3.3V: C2.2 C4.1 C5.1 C6.1 C7.1 C8.1 C9.1 C10.1 C11.1 C12.1 J2.1 P1.1 R3.1 R4.1 R6.1 R8.1 R10.1 R12.1 R14.1 R16.1 R18.1 R20.1 R22.1 R24.1 R26.1 R28.1 R30.1 R32.1 R34.1 R36.1 R38.1 R40.1 R42.1 R44.1 R46.1 R48.1 R50.1 R52.1 R54.1 R56.1 R58.1 R60.1 R62.1 U1.2 U2.13 U2.19 U2.32 U2.48 U2.64 | length 5557.7
  Top Layer w11.8: v1(1236.1,1416.12) 1243.92,1408.3 1266.61,1408.3 1268.49,1406.42 U2.13 ; U2.64 1376.77,1785.36 v1(1377.4,1786) ; v1(1415.4,1199) 1416.13,1199.73 U2.19 ; v1(1667.4,1201) 1667.4,1203.22 1672.04,1207.86 U2.32 ; U2.48 1826.04,1642.64 v1(1826.4,1643)
  Top Layer w29: R42.1 430,795 v1(445,780) ; R40.1 430,895 v1(445,880) ; R38.1 430,995 v1(445,980) ; R36.1 430,1095 v1(445,1080) ; R34.1 430,1195 v1(445,1180) ; R32.1 422.66,1295 437.66,1280 v1(445,1280) ; R30.1 422.66,1395 437.66,1380 v1(445,1380) ; R28.1 430,1495 v1(445,1480) ; R26.1 397.66,1595 412.66,1580 v1(445,1580) ; R24.1 430,1695 v1(445,1680) ; C2.2 340.47,2054.28 375.91,2018.85 399.53,2018.85 U1.2@627.87,2018.85 ; v1(723.53,2019.84) 722.54,2018.85 U1.2@627.87,2018.85 ; R3.1 644.86,2175.37 627.87,2158.38 U1.2@627.87,2018.85 ; R22.1 v1(860,1046.97) ; R20.1 v1@960,1070 ; R18.1 v1@1060,1070 ; R16.1 v1@1160,1070 ; R14.1 v1@1260,1070 ; R12.1 v1(1360,1038) ; J2.1 1371.26,1913.74 v1(1395,1890) ; R10.1 v1@1460,1070 ; R8.1 v1@1560,1070 ; R6.1 v1@1660,1070 ; R4.1 1760,1070 v1(1765,1075) ; P1.1 2030,2125 v1(2055,2100) ; v1(2045,835) 2070,810 R44.1 ; v1(2045,1035) 2070,1010 R48.1 ; v1(2045,1135) 2070,1110 R50.1 ; v1(2045,1235) 2070,1210 R52.1 ; v1(2045,1335) 2070,1310 R54.1 ; v1(2045,1435) 2070,1410 R56.1 ; v1(2045,1535) 2070,1510 R58.1 ; v1(2045,1635) 2070,1610 R60.1 ; v1(2045,1735) 2070,1710 R62.1 ; v1(2056.68,923.32) 2082.68,897.32 2112.63,897.32 2120.13,904.81 2159.22,904.81 2160.47,906.06 R46.1
  Bottom Layer w11.8: v1(1228.4,1364) C11.1 ; v1(1236.1,1416.12) 1238.32,1416.12 1242.44,1412 C12.1 ; C7.1 v2@1341.4,1785 ; v1(1377.4,1786) 1378.97,1784.43 1378.97,1750.55 C8.1 ; C6.1 1413.83,1240.45 1413.83,1200.57 v1(1415.4,1199) ; C4.1 1664.4,1206.22 1667.4,1203.22 v1(1667.4,1201) ; C5.1 1811.18,1630 1824.18,1643 v1(1826.4,1643) ; C9.1 v1(1826.4,1672) ; C10.1 1774.46,1713.5 1825.9,1713.5 v1(1826.4,1713)
  Bottom Layer w32: C11.1 C12.1 ; C7.1 C8.1 ; C5.1 C9.1 C10.1
  other v1: 965,1075 1065,1075 1165,1075 1265,1075 1465,1075 1565,1075 1665,1075
  other v2: 1341.4,1786
+5V: C1.2 C3.2 J1.1 U1.0 | length 390.6
  Top Layer w29: J1.1 217.72,2041.47 C3.2 C1.2 274.53,2051.28 274.53,1970.84 317.07,1928.3 U1.0
Boot0: J2.2 R2.2 | length 123
  Top Layer w11.8: R2.2@1450,1889.06 R2.2
  Top Layer w32: R2.2@1450,1889.06 J2.2
GND: C1.1 C2.1 C3.1 C4.2 C5.2 C6.2 C7.2 C8.2 C9.2 C10.2 C11.2 C12.2 C13.2 C14.1 C15.1 C16.1 C17.1 DS1.2 J1.2 J2.3 P1.4 R5.2 R7.2 R9.2 R11.2 R13.2 R15.2 R17.2 R19.2 R21.2 R23.2 R25.2 R27.2 R29.2 R31.2 R33.2 R35.2 R37.2 R39.2 R41.2 R43.2 R45.2 R47.2 R49.2 R51.2 R53.2 R55.2 R57.2 R59.2 R61.2 R63.2 SW1.2 U1.1 U2.12 U2.18 U2.31 U2.47 U2.63 Y1.2 Y1.4 | length 5157.8
  Top Layer w11.8: Y1.2 1052.4,1431.16 v1(1052.4,1396) 1054.62,1396 1058.62,1400 C15.1 ; Y1.2@1081.72,1420.66 1081.72,1432.91 1065.97,1448.66 1121.08,1503.77 1121.08,1523.46 Y1.4@1136.83,1539.21 ; C14.1 1101.4,1574.02 1105.34,1570.07 1105.97,1570.07 Y1.4@1136.83,1539.21 ; Y1.4 Y1.4@1136.83,1539.21 ; v1(1172.4,1564) 1170.83,1562.43 1160.05,1562.43 Y1.4@1136.83,1539.21 ; U2.12 1382.13,1426.1 1401.02,1445 v1(1402.4,1445) ; U2.18 1396.45,1357.83 1400.4,1361.78 v1(1400.4,1364) ; U2.63@1396.45,1715.47 1396.45,1674.54 1433.99,1637 v1(1434.4,1637) ; v1(1649.4,1361) 1649.4,1358.78 1652.35,1355.83 U2.31 ; v1(1667.4,1610) 1669.62,1610 1682.57,1622.95 U2.47
  Top Layer w29: J1.2 124.26,2115.48 190.95,2115.48 197.03,2109.4 C3.1 C1.1 C2.1 423.15,2109.4 428.33,2114.59 428.33,2138.21 v1@457.97,2167.84 ; DS1.2 784.53,1861.37 925,1720.9 v1(925,1715) ; v1(1655,2100) 1655,2125 P1.4
  Bottom Layer w11.8: v1@927.4,1718 956.4,1718 ; C17.1 965.46,1657.95 956.4,1667 956.4,1718 ; C16.1 988.12,1776 963.4,1776 956.4,1769 956.4,1718
  Bottom Layer w29: R43.2 304.06,791.06 305.3,789.81 309.24,789.81 339.06,760 v1(385,760) ; R41.2@305.3,889.81 359.69,889.81 v1(385,864.5) ; R39.2@309.24,989.81 339.06,960 v1(385,960) ; R37.2@309.24,1089.81 339.06,1060 v1(385,1060) ; R35.2@309.24,1189.81 339.06,1160 v1(385,1160) ; R33.2@309.24,1289.81 339.06,1260 v1(385,1260) ; R31.2@309.24,1389.81 339.06,1360 v1(385,1360) ; R29.2@309.24,1489.81 339.06,1460 v1(385,1460) ; R27.2@309.24,1589.81 339.06,1560 v1(385,1560) ; R25.2@309.24,1689.81 339.06,1660 v1(385,1660) ; R23.2@863.94,969.53 895,1000.59 v1(895,1035) ; R21.2@963.94,969.53 995,1000.59 v1(995,1035) ; R19.2@1063.94,969.53 1095,1000.59 v1(1095,1035) ; R17.2@1163.94,969.53 1195,1000.59 v1(1195,1035) ; R15.2@1263.94,969.53 1295,1000.59 v1(1295,1035) ; C11.2 C12.2 1369.4,1412 v1(1402.4,1445) 1400,1445 1332,1513 C13.2 ; R13.2@1363.94,969.53 1395,1000.59 v1(1395,1035) ; C8.2 C7.2 1341.4,1688.96 1393.36,1637 v1(1434.4,1637) ; v1(1400.4,1364) 1409.4,1355 C6.2 ; R11.2@1463.94,969.53 1495,1000.59 v1(1495,1035) ; v1(1515,1890) 1528.74,1903.74 J2.3 ; R9.2@1563.94,969.53 1595,1000.59 v1(1595,1035) ; v1(1649.4,1361) 1664.4,1346 C4.2 ; R7.2@1663.94,969.53 1695,1000.59 v1(1695,1035) ; v1(1667.4,1610) 1686.94,1629.54 1718.38,1629.54 C5.2 C9.2 C10.2 ; R5.2 1763.94,969.53 1795,1000.59 v1(1795,1035) ; v1(2100,845) 2129.41,845 R45.2@2160.47,813.94 ; v1(2100,927.82) 2112.63,915.19 2159.22,915.19 R47.2@2160.47,913.94 ; v1(2100,1145) 2129.41,1145 R51.2@2160.47,1113.94 ; v1(2100,1245) 2129.41,1245 R53.2@2160.47,1213.94 ; v1(2100,1345) 2129.41,1345 R55.2@2160.47,1313.94 ; v1(2100,1445) 2129.41,1445 R57.2@2160.47,1413.94 ; v1(2100,1545) 2129.41,1545 R59.2@2160.47,1513.94 ; v1(2100,1645) 2129.41,1645 R61.2@2160.47,1613.94 ; v1(2100,1745) 2129.41,1745 2160.47,1713.94 R63.2 ; v1(2101.25,1046.25) 2130.66,1046.25 R49.2@2161.72,1015.18 ; R49.2 R49.2@2161.72,1011.25
  other v1: 459.53,2167.84
in/out: C14.2 R1.2 Y1.1 | length 85.7
  Top Layer w19: Y1.1 C14.2 R1.2
NetDS1_1: DS1.1 R3.2 | length 62.1
  Top Layer w29: R3.2 725.78,2115.07 780.74,2115.07 DS1.1
NetR1_1: R1.1 U2.6 | length 783.1
  Top Layer w11.8: R1.1 1125.02,1624.94 1097.38,1652.59 1045.29,1652.59 1032.42,1639.71 1032.42,1504.76 1042.28,1494.89 1042.28,1485.11 1032.42,1475.24 1032.42,1414.2 1030.5,1412.29 1030.5,1386.93 1043.33,1374.1 1061.47,1374.1 1064.65,1377.27 1150.16,1377.27 1196.4,1423.51 1196.4,1480.42 1205.99,1490.01 1205.99,1533.59 1216.61,1544.21 U2.6
NetR2_1: R2.1 U2.60 | length 109.7
  Top Layer w11.8: R2.1 1455.5,1824.5 U2.60
NRST: C13.1 SW1.3 U2.7 | length 593.3
  Top Layer w11.8: v1(1228.4,1500) 1252.93,1524.53 U2.7
  Bottom Layer w11.8: SW1.3 934.4,1599 1169.4,1599 1228.4,1540 v1(1228.4,1500) 1248.4,1520 1268.84,1520 C13.1
out/in: C15.2 U2.5 Y1.3 | length 309.4
  Top Layer w11.8: Y1.3 1170.49,1444.72 1177.4,1451.64 1177.4,1486.6 1188.19,1497.38 1188.19,1544.79 1207.3,1563.9 U2.5
  Top Layer w19: C15.2 Y1.3
PA0: J4.9 R40.2 R41.1 U2.14 | length 1574.4
  Top Layer w11.8: R40.2@245,891.06 291.06,845 373.53,845 375.93,842.6 593.12,842.6 992.31,1241.79 1039.85,1241.79 1139.74,1341.67 1164.91,1341.67 1209.97,1386.73 U2.14
  Top Layer w29: J4.9 R40.2
  Bottom Layer w29: J4.9@105,896.06 R41.1@240,896.06
PA1: J4.10 R42.2 R43.1 U2.15 | length 1671.3
  Top Layer w11.8: R42.2@245,791.06 297.96,738.1 448.1,738.1 450,740 452.1,737.9 612.9,737.9 735,860 735,959.31 999.68,1223.99 1119.36,1223.99 1262.42,1367.05 U2.15
  Top Layer w29: J4.10 R42.2
  Bottom Layer w29: J4.10@105,796.06 R43.1@240,796.06
PA2: J3.10 R22.2 R23.1 U2.16 | length 1131.9
  Top Layer w11.8: R22.2@863.94,910.47 892.5,939.04 892.5,957.5 933.6,998.6 933.6,1080.94 1002.96,1150.3 1342.63,1150.3 1358.96,1166.63 1358.96,1285 1333.46,1310.5 1333.46,1347.36 U2.16
  Top Layer w29: J3.10 R22.2
  Bottom Layer w29: J3.10@860.56,788.15 R23.1@860.56,913.63
PA3: J3.9 R20.2 R21.1 U2.17 | length 941.1
  Top Layer w11.8: R20.2@963.94,910.47 1000,946.54 1000,960 1028.41,988.41 1028.41,1075.75 1085.16,1132.5 1350,1132.5 1376.76,1159.26 U2.17
  Top Layer w29: J3.9 R20.2
  Bottom Layer w29: J3.9@960.56,788.15 R21.1@960.56,913.63
PA4: J3.8 R18.2 R19.1 U2.20 | length 884.3
  Top Layer w11.8: R18.2@1063.94,910.47 1095,941.54 1095,960 1131.18,996.18 1131.18,1078.52 1167.36,1114.7 1362.07,1114.7 1437.3,1189.93 1437.3,1213.77 1435.82,1215.25 U2.20
  Top Layer w29: J3.8 R18.2
  Bottom Layer w29: J3.8@1060.56,788.15 R19.1@1060.56,913.63
PA5: J3.7 R16.2 R17.1 U2.21 | length 806
  Top Layer w11.8: R16.2@1163.94,910.47 1195,941.54 1195,960 1204.89,969.89 1233.6,998.6 1233.6,1080.94 1249.56,1096.9 1369.45,1096.9 1455.1,1182.56 1455.1,1184.42 1455.5,1184.83 U2.21
  Top Layer w29: J3.7 R16.2
  Bottom Layer w29: J3.7@1160.56,788.15 R17.1@1160.56,913.63
PA6: J3.6 R14.2 R15.1 U2.22 | length 711.5
  Top Layer w11.8: R14.2@1263.94,910.47 1295,941.54 1295,965 1333.6,1003.6 1333.6,1048.94 1349.06,1064.4 1364.4,1064.4 1475.19,1175.19 U2.22
  Top Layer w29: J3.6 R14.2
  Bottom Layer w29: J3.6@1260.56,788.15 R15.1@1260.56,913.63
PA7: J3.5 R12.2 R13.1 U2.23 | length 669.2
  Top Layer w11.8: R12.2@1363.94,910.47 1395,941.54 1395,970 1433.6,1008.6 1433.6,1080.94 1494.87,1142.21 U2.23
  Top Layer w29: J3.5 R12.2
  Bottom Layer w29: J3.5@1360.56,788.15 R13.1@1360.56,913.63
PA8: J5.5 R52.2 R53.1 U2.41 | length 979.5
  Top Layer w11.8: U2.41 1785.8,1504.84 1860,1430.65 1860,1225 1910,1175 2188.46,1175 2219.53,1206.06 R52.2
  Top Layer w29: R52.2 J5.5
  Bottom Layer w29: R53.1 J5.5
PA9: J5.6 R54.2 R55.1 U2.42 | length 890.7
  Top Layer w11.8: U2.42 1791.29,1524.53 1876.42,1439.4 1877.8,1438.02 1877.8,1327.2 1930,1275 2188.46,1275 2219.53,1306.06 R54.2
  Top Layer w29: R54.2 J5.6
  Bottom Layer w29: R55.1 J5.6
PA10: J5.7 R56.2 R57.1 U2.43 | length 796.6
  Top Layer w11.8: U2.43 1796.78,1544.21 1970.99,1370 2183.46,1370 2219.53,1406.06 R56.2
  Top Layer w29: R56.2 J5.7
  Bottom Layer w29: R57.1 J5.7
PA11: J5.8 R58.2 R59.1 U2.44 | length 759.2
  Top Layer w11.8: U2.44 1780.31,1563.9 1782.19,1562.02 1804.15,1562.02 1891.16,1475 2188.46,1475 2219.53,1506.06 R58.2
  Top Layer w29: R58.2 J5.8
  Bottom Layer w29: R59.1 J5.8
PA12: J5.9 R60.2 R61.1 U2.45 | length 726.5
  Top Layer w11.8: U2.45 2134.63,1583.58 2139.8,1578.41 2197.6,1578.41 2209.68,1590.49 2209.68,1600.15 R60.2
  Top Layer w29: R60.2 J5.9
  Bottom Layer w29: R61.1 J5.9
PA13: J5.10 R62.2 R63.1 U2.50 | length 908.6
  Top Layer w11.8: U2.50 1652.36,1758.57 1671.58,1777.8 1942.2,1777.8 2045,1675 2188.46,1675 2219.53,1706.06 R62.2
  Top Layer w29: R62.2 J5.10
  Bottom Layer w29: R63.1 J5.10
PB0: J3.4 R10.2 R11.1 U2.26 | length 652.3
  Top Layer w11.8: R10.2@1463.94,910.47 1510,956.54 1510,985 1531.96,1006.96 1531.96,1079.3 1553.93,1101.26 U2.26
  Top Layer w29: J3.4 R10.2
  Bottom Layer w29: J3.4@1460.56,788.15 R11.1@1460.56,913.63
PB1: J3.3 R8.2 R9.1 U2.27 | length 654.9
  Top Layer w11.8: R8.2@1563.94,910.47 1573.79,920.32 1573.79,921.74 1591.59,939.54 1591.59,971.59 1616.9,996.9 1616.9,1110.87 1573.61,1154.15 U2.27
  Top Layer w29: J3.3 R8.2
  Bottom Layer w29: J3.3@1560.56,788.15 R9.1@1560.56,913.63
PB2: J3.2 R6.2 R7.1 U2.28 | length 694.4
  Top Layer w11.8: U2.28 1593.3,1194.31 1716.9,1070.71 1716.9,995.36 1691.59,970.05 1691.59,934.2 1677.7,920.32 1669.85,920.32 R6.2
  Top Layer w29: J3.2 R6.2
  Bottom Layer w29: J3.2@1660.56,788.15 R7.1@1660.56,913.63
PB4: J4.1 R24.2 R25.1 U2.56 | length 2229.5
  Top Layer w11.8: R24.2@245,1691.06 297.96,1638.1 563.1,1638.1 745,1820 v1(745,1885) ; v1(825,1895) 860,1860 951.44,1860 967.69,1876.25 1171.25,1876.25 v1(1265,1970) ; U2.56 1534.25,1770.81 1610,1846.56 v1(1610,1970)
  Top Layer w29: J4.1 R24.2
  Bottom Layer w11.8: v1(745,1885) 812.78,1885 822.78,1895 v1(825,1895) ; v1(1265,1970) 1267.22,1970 1269.71,1967.51 1465.53,1967.51 1489.37,1991.35 1489.37,2018.65 1513.21,2042.49 1544.27,2042.49 1576.35,2010.41 1576.35,2003.65 v1(1610,1970)
  Bottom Layer w29: J4.1@105,1696.06 R25.1@240,1696.06
PB5: J4.2 R26.2 R27.1 U2.57 | length 2077.5
  Top Layer w11.8: R26.2@245,1591.06 297.96,1538.1 488.27,1538.1 765.33,1815.16 765.33,1833.43 v1(766.9,1835) ; v1(844.51,1844.51) 846.08,1842.95 851.88,1842.95 852.63,1842.2 958.81,1842.2 975.06,1858.45 1178.62,1858.45 1240.17,1920 v1(1275,1920) ; U2.57 1514.56,1776.3 1580,1841.74 v1(1580,1920)
  Top Layer w29: J4.2 R26.2
  Bottom Layer w11.8: v1(766.9,1835) 810.91,1835 818.86,1842.95 842.95,1842.95 v1(844.51,1844.51) ; v1(1275,1920) 1395.97,1920 1452.37,1863.6 1525.94,1863.6 1555.14,1892.8 1555.14,1895.14 v1(1580,1920)
  Bottom Layer w29: J4.2@105,1596.06 R27.1@240,1596.06
PB6: J4.3 R28.2 R29.1 U2.58 | length 1928.9
  Top Layer w11.8: R28.2@245,1491.06 297.96,1438.1 453.1,1438.1 475,1460 475,1499.65 758.15,1782.8 761.73,1782.8 773.35,1794.43 v1(775.57,1794.43) ; v1(885,1810) 951.78,1810 982.43,1840.65 1186,1840.65 1230.35,1885 v1(1315,1885) ; U2.58 1494.87,1781.78 1520,1806.91 v1(1520,1840)
  Top Layer w29: J4.3 R28.2
  Bottom Layer w11.8: v1(775.57,1794.43) 777.79,1794.43 793.36,1810 v1(885,1810) ; v1(1315,1885) 1360,1840 v1(1520,1840)
  Bottom Layer w29: J4.3@105,1496.06 R29.1@240,1496.06
PB7: J4.4 R30.2 R31.1 U2.59 | length 1951.5
  Top Layer w11.8: R30.2@245,1391.06 297.96,1338.1 453.1,1338.1 500,1385 500,1499.48 765.52,1765 v1(820,1765) ; v1(915,1785) 951.96,1785 989.81,1822.85 1193.37,1822.85 1223.17,1852.65 1479.61,1852.65 1486.59,1845.68 1486.59,1803.99 1475.19,1792.6 U2.59
  Top Layer w29: J4.4 R30.2
  Bottom Layer w11.8: v1(820,1765) 840,1785 v1(915,1785)
  Bottom Layer w29: J4.4@105,1396.06 R31.1@240,1396.06
PB8: J4.5 R32.2 R33.1 U2.61 | length 2076.7
  Top Layer w11.8: R32.2@245,1291.06 301.06,1235 875,1235 912.62,1272.62 912.62,1547.62 951.4,1586.4 951.4,1759.27 997.18,1805.05 1200.74,1805.05 1221.39,1825.7 1393.85,1825.7 1435.82,1783.73 U2.61
  Top Layer w29: J4.5 R32.2
  Bottom Layer w29: J4.5@105,1296.06 R33.1@240,1296.06
PB9: J4.6 R34.2 R35.1 U2.62 | length 2090.4
  Top Layer w11.8: R34.2@245,1191.06 306.06,1130 805,1130 930.42,1255.42 930.42,1540.24 977.24,1587.06 977.24,1759.94 1004.55,1787.25 1208.12,1787.25 1228.76,1807.9 1386.47,1807.9 1416.13,1778.24 U2.62
  Top Layer w29: J4.6 R34.2
  Bottom Layer w29: J4.6@105,1196.06 R35.1@240,1196.06
PB10: J3.1 R4.2 R5.1 U2.29 | length 765.4
  Top Layer w11.8: U2.29 1612.99,1224.44 1702.43,1135 1759.31,1135 1816.9,1077.41 1816.9,951.9 1785.32,920.32 1769.85,920.32 R4.2
  Top Layer w29: J3.1 R4.2
  Bottom Layer w29: J3.1@1760.56,788.15 R5.1@1760.56,913.63
PB11: J5.1 R44.2 R45.1 U2.33 | length 1218.4
  Top Layer w11.8: U2.33 1774.4,1347.36 1774.41,1145.07 1845,1074.48 1845,830 1896.59,778.41 2191.88,778.41 2219.53,806.06 R44.2
  Top Layer w29: R44.2 J5.1
  Bottom Layer w29: R45.1 J5.1
PB12: J5.2 R46.2 R47.1 U2.34 | length 1140
  Top Layer w11.8: U2.34 1785.81,1367.05 1798.11,1354.74 1798.11,1146.54 1862.8,1081.85 1862.8,932.2 1925,870 2183.46,870 2219.53,906.06 R46.2
  Top Layer w29: R46.2 J5.2
  Bottom Layer w29: R47.1 J5.2
PB13: J5.3 R48.2 R49.1 U2.35 | length 1077.6
  Top Layer w11.8: U2.35 1807.8,1386.73 1815,1379.54 1815,1363.02 1815.91,1362.11 1815.91,1153.91 1885,1084.83 1885,1030 1965.28,949.72 2163.18,949.72 2219.53,1006.06 R48.2
  Top Layer w29: R48.2 J5.3
  Bottom Layer w29: R49.1 J5.3
PB14: J5.4 R50.2 R51.1 U2.36 | length 988.5
  Top Layer w11.8: U2.36 1813.29,1406.42 1835,1384.71 1835,1160 1916.59,1078.41 2191.88,1078.41 2219.53,1106.06 R50.2
  Top Layer w29: R50.2 J5.4
  Bottom Layer w29: R51.1 J5.4
PC0: J4.7 R36.2 R37.1 U2.8 | length 2218.4
  Top Layer w11.8: R36.2@245,1091.06 301.06,1035 735.17,1035 948.22,1248.04 948.22,1358.19 958.79,1368.76 958.79,1488.16 966.02,1495.39 966.02,1550.67 995.04,1579.69 995.04,1752.56 1011.93,1769.45 1237.73,1769.45 1357.17,1650.01 1357.17,1517.15 1344.86,1504.84 U2.8
  Top Layer w29: J4.7 R36.2
  Bottom Layer w29: J4.7@105,1096.06 R37.1@240,1096.06
PC1: J4.8 R38.2 R39.1 U2.9 | length 1589.3
  Top Layer w11.8: R38.2@245,991.06 297.96,938.1 663.45,938.1 1084.82,1359.47 1157.54,1359.47 1214.2,1416.14 1214.2,1436.36 1263,1485.16 U2.9
  Top Layer w29: J4.8 R38.2
  Bottom Layer w29: J4.8@105,996.06 R39.1@240,996.06
SWCLK: P1.3 U2.49 | length 597.6
  Top Layer w11.8: U2.49 1672.04,1753.08 1678.96,1760 1703.99,1760 1713.99,1750 v1(1715,1750)
  Top Layer w29: v1(1700,1810) 1700,2070 P1.3
  Bottom Layer w29: v1(1700,1810) 1700,1807.78 1715,1792.78 v1(1715,1750)
SWDIO: P1.2 U2.46 | length 843.4
  Top Layer w11.8: U2.46 1820.57,1603.27 1822.78,1605.48 v1(1825,1605.48)
  Top Layer w29: v1(1750,1810) 1750,2046.47 1897.03,2193.5 1923.5,2193.5 P1.2
  Bottom Layer w11.8: v1(1750,1810) 1749.06,1809.06 1749.06,1728.56 1746.06,1725.56 1746.06,1615.01 1758.97,1602.1 1819.4,1602.1 1822.78,1605.48 v1(1825,1605.48)
pads on no net: SW1.1 SW1.4 U2.1 U2.2 U2.10 U2.11 U2.24 U2.25 U2.30 U2.37 U2.38 U2.39 U2.40 U2.51 U2.52 U2.53 U2.54 U2.55

## Polygon pours and split planes (outlines as drawn)
GND on Bottom Layer "GND_L04_P001" (solid, remove dead copper, pour order 1): 0,693.98 cw(c0,710) -16.01,710 -16.01,2285 cw(c0,2285) 0,2301.01 2400,2301.01 cw(c2400,2285) 2412.5,2295.01 cw(c2425,2285) 2441.01,2285 2441.02,710 cw(c2425,710) 2412.5,699.99 cw(c2400,710) 2400,693.98
GND on Top Layer "GND_L01_P000" (solid, remove dead copper, pour order 0): 0,693.98 cw(c0,710) -16.01,710 -16.01,2285 cw(c0,2285) 0,2301.01 2400,2301.01 cw(c2400,2285) 2412.5,2295.01 cw(c2425,2285) 2441.01,2285 2441.02,710 cw(c2425,710) 2412.5,699.99 cw(c2400,710) 2400,693.98
GND on GND_layer (split plane): 2398.29,2280.8 2401.33,2278.3 2404.81,2276.44 2408.58,2275.3 2412.5,2274.91 2416.42,2275.3 2420.19,2276.44 2420.92,2276.83 2420.92,718.17 2420.19,718.56 2416.42,719.7 2412.5,720.09 2408.58,719.7 2404.81,718.56 2401.33,716.7 2398.29,714.2 2398.19,714.08 4.08,714.08 4.08,2280.92 2398.19,2280.92
+3.3V on 3.3v_layer (split plane): 2398.29,2280.8 2401.33,2278.3 2404.81,2276.44 2408.58,2275.3 2412.5,2274.91 2416.42,2275.3 2420.19,2276.44 2420.92,2276.83 2420.92,718.17 2420.19,718.56 2416.42,719.7 2412.5,720.09 2408.58,719.7 2404.81,718.56 2401.33,716.7 2398.29,714.2 2398.19,714.08 4.08,714.08 4.08,2280.92 2398.19,2280.92

## Keep-outs
Keep-Out Layer:
  lines w32: 2400,710 0,710 0,2285 2400,2285 ; 2425,710 2425,2285

## Silkscreen, mask and mechanical layers (free items; w line width, h text height)
Top Overlay:
  text "GND" at 64.67,2190.78 h60
  text "3.3V" at 1389.33,2066 h60 r90
  text "BOOT" at 1468.07,2066 h60 r90
  text "GND" at 1546.75,2066 h60 r90
  text "GND" at 1748.01,2020.32 h60 r90
  text "3.3V" at 2048.07,2019.82 h60 r90
  text "SWCLK" at 1848.04,1952.39 h60 r90
  text "SWDIO" at 1948.07,1951 h60 r90
  text "5V" at 88.2,1931.78 h60
  text "PA13" at 1993.82,1691.93 h60
  text "PB4" at 345.82,1676.71 h60
  text "PA12" at 1993.82,1591.16 h60
  text "PB5" at 345.82,1577.38 h60
  text "PA11" at 1993.82,1491.16 h60
  text "PB6" at 345.82,1477.38 h60
  text "PA10" at 1993.82,1391.93 h60
  text "PB7" at 345.82,1376.6 h60
  text "PA9" at 1993.82,1291.88 h60
  text "PB8" at 345.82,1277.43 h60
  text "PA8" at 1993.82,1191.99 h60
  text "PB9" at 345.82,1177.32 h60
  text "PB14" at 1993.82,1091.27 h60
  text "PC0" at 345.82,1077.38 h60
  text "PA2" at 878.09,1014.82 h60 r90
  text "PA3" at 977.32,1014.82 h60 r90
  text "PA4" at 1077.98,1014.82 h60 r90
  text "PA5" at 1177.32,1014.82 h60 r90
  text "PA6" at 1277.32,1014.82 h60 r90
  text "PA7" at 1378.09,1014.82 h60 r90
  text "PB0" at 1477.32,1014.82 h60 r90
  text "PB1" at 1578.09,1014.82 h60 r90
  text "PB2" at 1678.09,1014.82 h60 r90
  text "PB10" at 1777.32,1014.82 h60 r90
  text "PB13" at 1993.82,991.93 h60
  text "PC1" at 345.82,977.32 h60
  text "PB12" at 1993.82,891.16 h60
  text "PA0" at 345.82,877.38 h60
  text "PB11" at 1993.82,791.16 h60
  text "PA1" at 345.82,776.6 h60